# Altium PCB 555timer_blinker.PcbDoc
Units mm, origin at the board's own origin, x right, y up, seen from the top; angles counter-clockwise.
Board outline 31.37 x 56.64 mm, 2 copper layers (Top Layer, Bottom Layer); 12 components, 6 nets, 30 pads, 0 vias.
Unrouted connection lines stored in the file: 1.
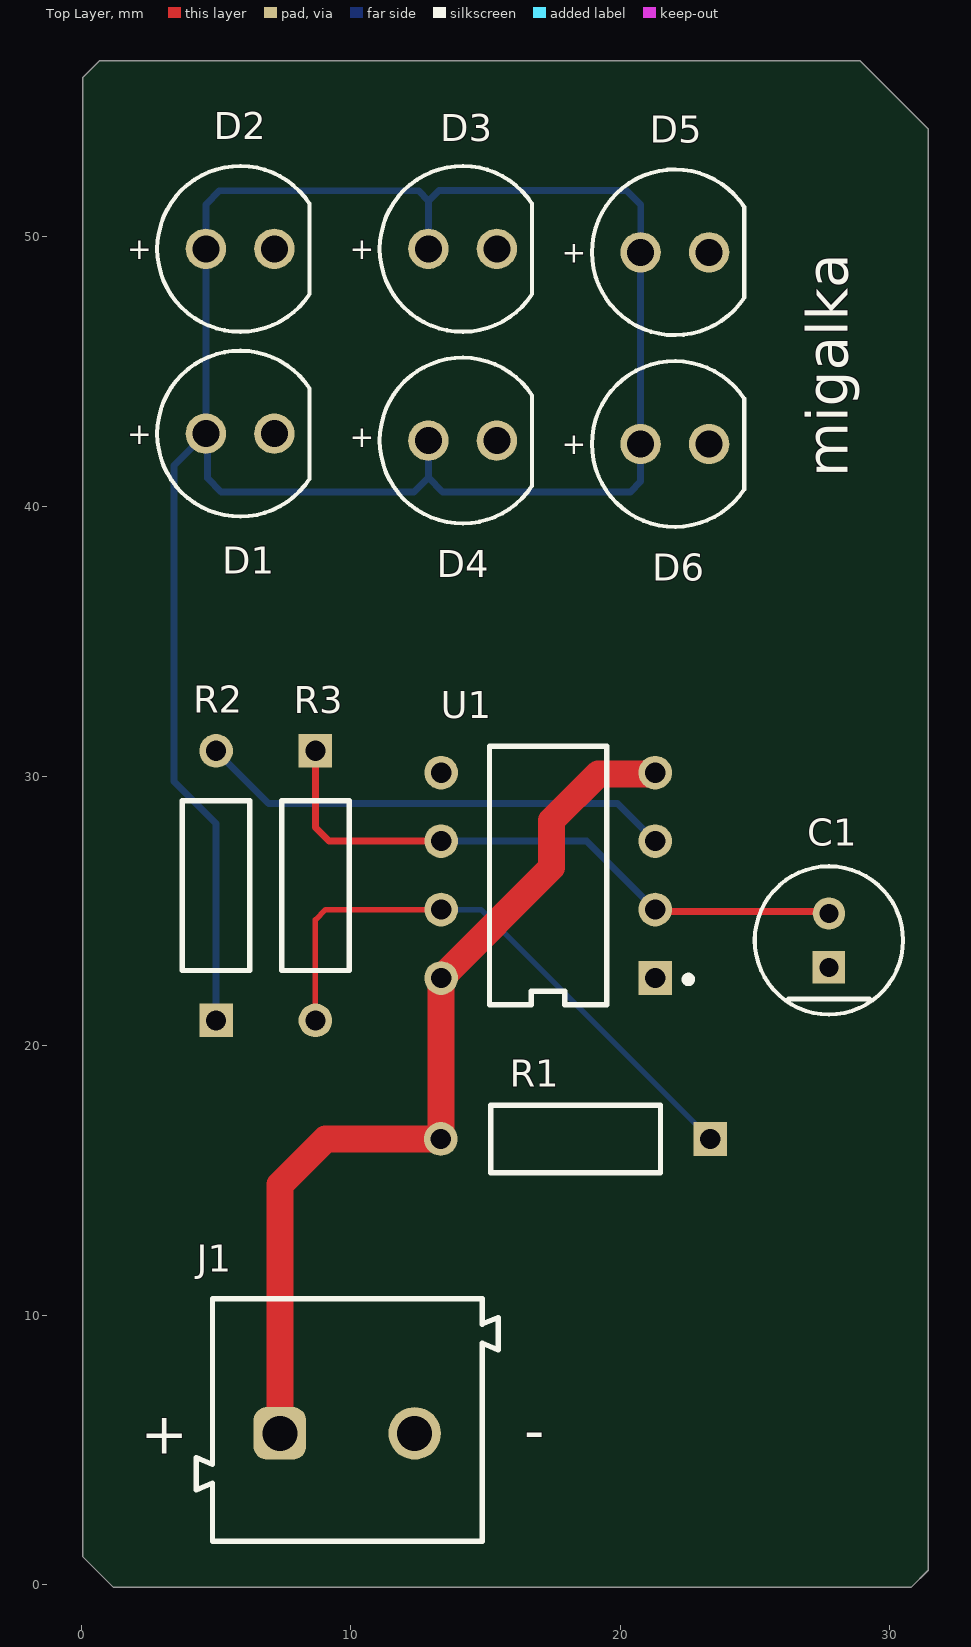
[diagram p0: Top Layer view]
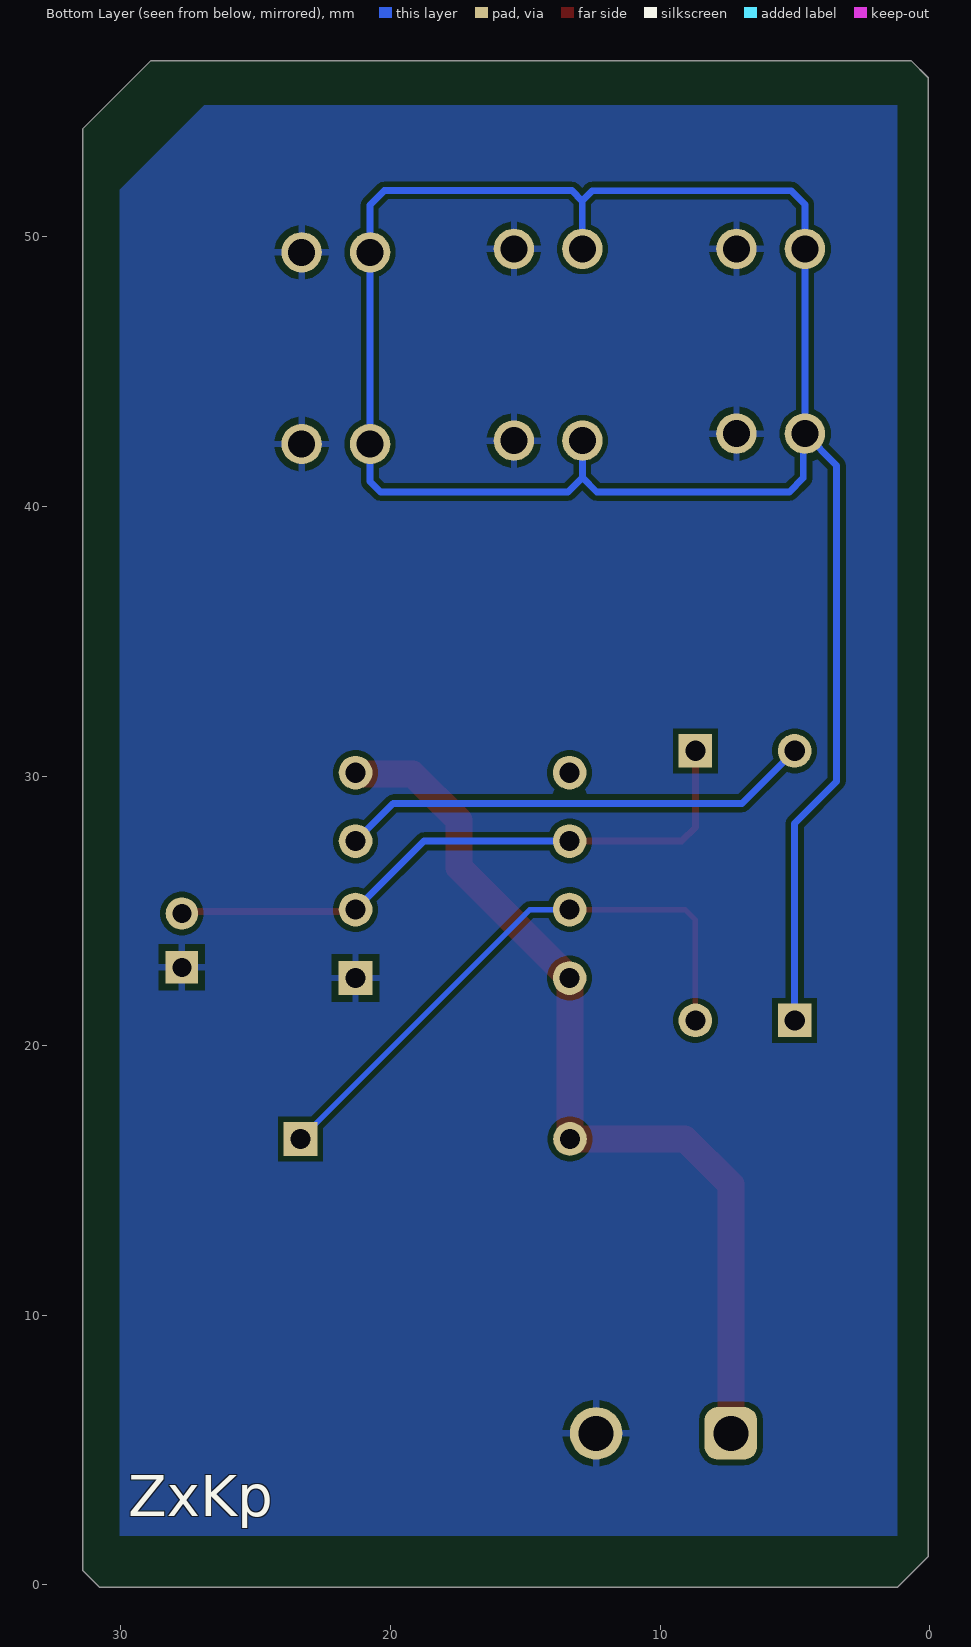
[diagram p1: Bottom Layer view, seen from below]
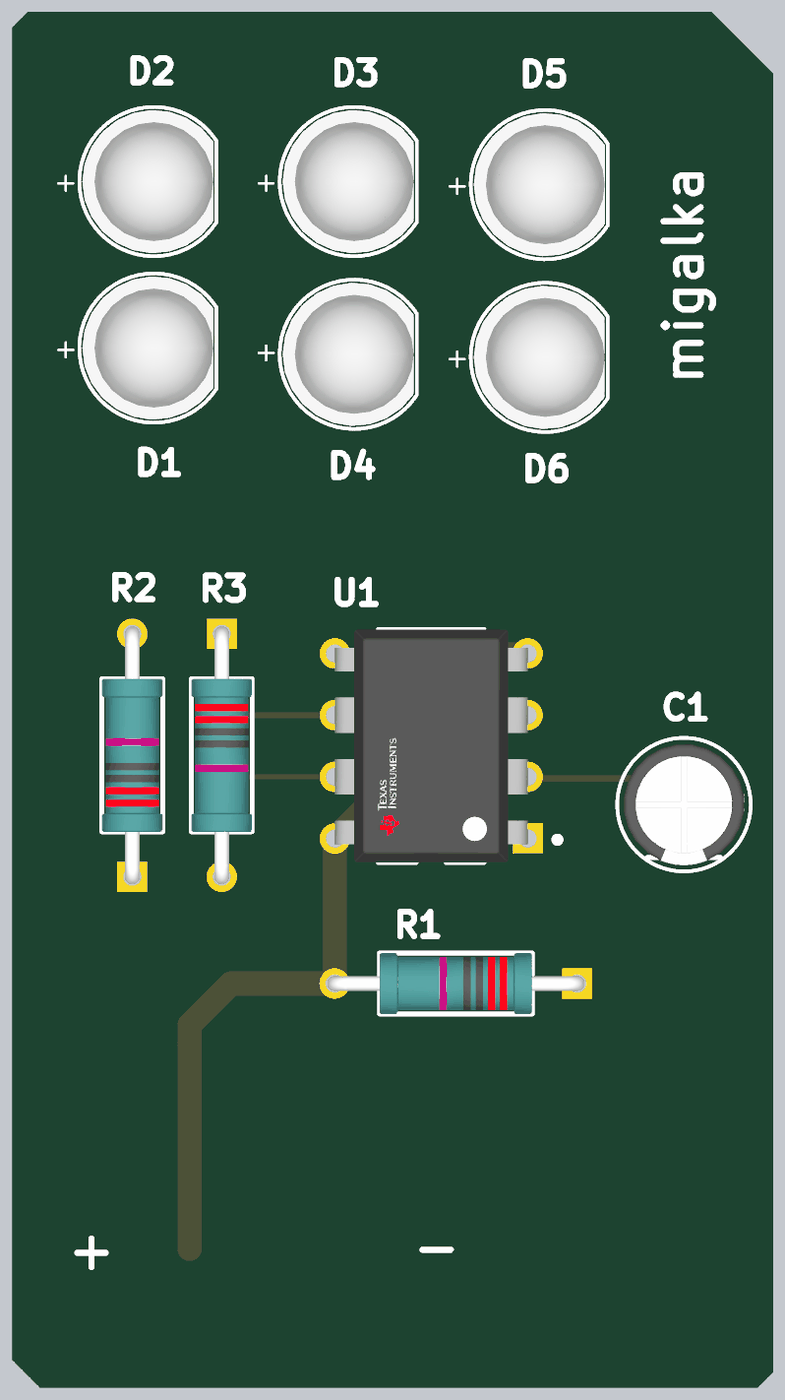
[diagram p2: 3D render of the assembled board from above, using the file's embedded part models]

## Layer stack, top to bottom
Top Solder: solder mask 0.0102, Solder Resist, Dk 3.5
Top Layer: signal copper 0.0356
Dielectric 1: dielectric 0.32, FR-4, Dk 4.8
Bottom Layer: signal copper 0.0356
Bottom Solder: solder mask 0.0102, Solder Resist, Dk 3.5

## Board outline
0.054,1.045 0.054,55.909 0.689,56.544 28.883,56.544 31.423,54.004 31.423,0.537 30.788,-0.098 1.197,-0.098

## Design rules (kind name [scope] priority, off if disabled: settings)
AssemblyTestPointUsage [All] p1: isadvanced=TRUE
AssemblyTestpoint [All] p1: isadvanced=TRUE testpointundercomponent=TRUE minsize=1.016 maxsize=2.54 preferedsize=1.524 minholesize=0 maxholesize=1.016 preferedholesize=0.813 testpointgrid=0.025 usegrid=TRUE gridtolerance=0 allowsidetop=TRUE allowsidebottom=TRUE
Clearance Clearance_1 [OnMid vs OnMid] p1: gap=0.2 ignorepadtopadclearanceinfootprint=FALSE sourcerule=37 cellrowname=All cellrowtype=0 cellcolname=All cellcoltype=0 innerlayers=TRUE
Clearance Clearance_2 [(ExistsOnLayer('Top Layer') Or ExistsOnLayer('Bottom Layer')) vs (ExistsOnLayer('Top Layer') Or ExistsOnLayer('Bottom Layer'))] p2: gap=0.2 ignorepadtopadclearanceinfootprint=FALSE sourcerule=37 cellrowname=All cellrowtype=0 cellcolname=All cellcoltype=0 outerlayers=TRUE
Clearance [All] p3: gap=0.254 ignorepadtopadclearanceinfootprint=FALSE ismatrix=TRUE
ComponentClearance [All] p1: isadvanced=TRUE gap=0.254 collisioncheckmode=3 verticalgap=0.254 showdistances=FALSE
FabricationTestPointUsage [All] p1: isadvanced=TRUE valid=0 allowmultiple=FALSE
FabricationTestpoint [All] p1: isadvanced=TRUE side=3 testpointundercomponent=TRUE minsize=1.016 maxsize=2.54 preferedsize=1.524 minholesize=0 maxholesize=1.016 preferedholesize=0.813 testpointgrid=0.025 allowsidetop=TRUE allowsidebottom=TRUE usegrid=TRUE gridtolerance=0
FanoutControl Fanout_BGA [IsBGA] p1: isadvanced=TRUE bgadir=Out bgaviamode=Centered fanoutstyle=Auto fanoutdirection=Alternating viagrid=0.025 // Fanout_BGA (Default Rule)
FanoutControl Fanout_LCC [IsLCC] p2: isadvanced=TRUE bgadir=Out bgaviamode=Centered fanoutstyle=Auto fanoutdirection=Alternating viagrid=0.025 // Fanout_LCC (Default Rule)
FanoutControl Fanout_SOIC [IsSOIC] p3: isadvanced=TRUE bgadir=Out bgaviamode=Centered fanoutstyle=Auto fanoutdirection=Alternating viagrid=0.025 // Fanout_SOIC (Default Rule)
FanoutControl Fanout_Small [(CompPinCount < 5)] p4: isadvanced=TRUE bgadir=Out bgaviamode=Centered fanoutstyle=Auto fanoutdirection=OutThenIn viagrid=0.025 // Fanout_Small (Default Rule)
FanoutControl Fanout_Default [All] p5: isadvanced=TRUE bgadir=Out bgaviamode=Centered fanoutstyle=Auto fanoutdirection=Alternating viagrid=0.025 // Fanout_Default (Default Rule)
Height [All] p1: isadvanced=TRUE minheight=0 maxheight=25.4 prefheight=12.7
HoleSize [All] p1: isadvanced=TRUE absolutevalues=TRUE maxlimit=2.54 minlimit=0.025 maxpercent=80.000 minpercent=20.000
HoleToHoleClearance [All] p1: isadvanced=TRUE gap=0.254 allowstackedmicrovias=TRUE
LayerPairs [All] p1: isadvanced=TRUE enforce=TRUE
MinimumSolderMaskSliver [All] p1: isadvanced=TRUE minsoldermaskwidth=0.254
NetAntennae [All] p1: isadvanced=TRUE netantennaetolerance=0
PasteMaskExpansion [All] p1: isadvanced=TRUE expansion=0
PlaneClearance [All] p1: isadvanced=TRUE clearance=0.508
PlaneConnect [All] p1: isadvanced=TRUE planeconnectstyle=Relief reliefexpansion=0.508 reliefentries=4 reliefconductorwidth=0.254 reliefairgap=0.254
PolygonConnect [All] p1: connectstyle=Relief reliefconductorwidth=0.254 reliefentries=4 polygonreliefangle="90 Angle" airgapwidth=0.254
RoutingCorners [All] p1: isadvanced=TRUE cornerstyle=45-Degree minsetback=2.54 maxsetback=2.54
RoutingPriority [All] p1: isadvanced=TRUE routingpriority=0
RoutingVias [All] p1: holewidth=0.711 width=1.27 viastyle="Through Hole" minholewidth=0.711 minwidth=1.27 maxholewidth=0.711 maxwidth=1.27
ShortCircuit [All] p1: isadvanced=TRUE allowed=FALSE
SilkToSilkClearance [All] p1: isadvanced=TRUE silktosilkclearance=0.254
SilkToSolderMaskClearance [IsPad] p1: isadvanced=TRUE minsilkscreentomaskgap=0.254 clearancetoexposedcopper=TRUE
SolderMaskExpansion [All] p1: isadvanced=TRUE expansion=0.102 istentingtop=FALSE
UnRoutedNet [All] p1: isadvanced=TRUE
UnpouredPolygon [All] p1: isadvanced=TRUE
Width MaxMinWidth_1 [All] p1: isadvanced=TRUE maxlimit=1 minlimit=0.2 preferedwidth=0.2 minimp=50.000000 maximp=50.000000 favimp=50.000000
Width [All] p2: maxlimit=0.254 minlimit=0.254 preferedwidth=0.254
4 further rules are at their usual default settings.

## Components (designator, comment, footprint, x,y, rotation, side; value= is the part's Value field where it differs from the comment)
C1 "4.7uF" FP-RAD-TH-D_5_0_5-L_11_1-MFG 27.74,23.905 r90 top
D1 "151051RS11000" WL-TMRC_D5.9H8.7 5.896,42.705 r0 top
D2 "151051RS11000" WL-TMRC_D5.9H8.7 5.896,49.559 r0 top
D3 "151051RS11000" WL-TMRC_D5.9H8.7 14.151,49.559 r0 top
D4 "151051RS11000" WL-TMRC_D5.9H8.7 14.151,42.447 r0 top
D5 "151051RS11000" WL-TMRC_D5.9H8.7 22.025,49.432 r0 top
D6 "151051RS11000" WL-TMRC_D5.9H8.7 22.025,42.32 r0 top
J1 "691101710002" 691101710002 1279.873,1276.117 r0 top
R1 "10k" FP-MBB0207-MFG 18.342,16.539 r180 top value=10kR
R2 "100" FP-MBB0207-MFG 5.007,25.937 r90 top value=100R
R3 "100k" FP-MBB0207-MFG 8.69,25.937 r270 top value=100kR
U1 "LM555CN/NOPB" FP-P0008A-MFG 17.326,26.318 r180 top

## Footprints (in the part's own frame and the unit in brackets; to place one, negate y for a bottom-side part, rotate by r counter-clockwise, add the part's x,y. Pads: shape width x height; smd on the part's side, far side on the other; paste and mask are expansions set on the pad)
691101710002 [mm] "5,00mm - modular - blue - Horizontal entry with pressure clamp - 12,6mm height - 02p"
  rrect50% 1.95x1.95 hole 1.3: 1(-1272.5,-1270.5)
  round 1.95 hole 1.3: 2(-1267.5,-1270.5)
  silkscreen extent -1275.6,-1274.5 -1264.4,-1265.5, body extent -1275.6,-1274.5 -1264.4,-1265.5, height 12.65
FP-MBB0207-MFG [mm]
  rect 1.25x1.25 hole 0.75 paste-2539.97 mask+0: 1(-5,0)
  round 1.25 hole 0.75 paste-2539.97 mask+0: 2(5,0)
  silkscreen extent -3.15,-1.25 3.15,1.25, body extent -5.72,-1.35 5.72,1.35, height 0.25
FP-P0008A-MFG [mm]
  rect 1.25x1.25 hole 0.75 paste-2539.97 mask+0: 1(-3.97,3.81)
  round 1.25 hole 0.75 paste-2539.97 mask+0: 2(-3.97,1.27) 3(-3.97,-1.27) 4(-3.97,-3.81) 5(3.97,-3.81) 6(3.97,-1.27) 7(3.97,1.27) 8(3.97,3.81)
  silkscreen extent -5.33,-4.79 2.17,4.79, body extent -4.69,-5.18 4.69,5.18, height 0.25
FP-RAD-TH-D_5_0_5-L_11_1-MFG [mm]
  rect 1.2x1.2 hole 0.7 paste-2539.97 mask+0: 1(-1,0)
  round 1.2 hole 0.7 paste-2539.97 mask+0: 2(1,0)
  silkscreen extent -2.75,-2.75 2.75,2.75, body extent -2.85,-2.85 2.85,2.85, height 0.25
WL-TMRC_D5.9H8.7 [mm] "THT Mono-color Round Color LED, 2-leads"
  round 1.5 hole 1: 1(-1.27,0) 2(1.27,0)
  silkscreen extent -3.07,-3.07 2.58,3.08, body extent -2.95,-2.95 2.45,2.95, height 9.2

## Part data
C1: library part CMP-05427-000256-1, "Aluminum Electrolytic Capacitors (Radial Lead Type) AEC-Q200 Qualified 4.7uF ±20% 50V", Case/Package=Radial, ESR (Equivalent Series Resistance)=1.3R, Max Operating Temperature=105°C, Min Operating Temperature=-55°C, Package Quantity=2000, Ratings=AEC-Q200, Ripple Current=95mA, Tolerance=20%, Voltage Rating=50V, Capacitance=4.7uF, Contact Plating=Tin, Diameter=5mm, Features="General Purpose", Height=11mm, Height - Seated (Max)=0.472inch, Impedance=1.3R, Lead Diameter=0.5mm, Lead Pitch=2.5mm, Length=11mm, Life (Hours)=1000Hour, Mount="Through Hole", Packaging="Ammo Pack", Polarity=Polar, Radiation Hardening=No, RoHS Compliant=Yes, Series=FC, Termination=Radial, Voltage Rating (DC)=50V
D1 D2 D3 D4 D5 D6: library part CMP-1488-00008-2, Case/Package=Radial, Color=Red, Forward Current=100mA, Forward Voltage=2.1V, Max Operating Temperature=85°C, Max Reverse Voltage (DC)=5V, Min Operating Temperature=-40°C, Test Current=20mA, Dominant Wavelength=645nm, Height=8.6mm, Length=5mm, Lens Size=5mm, Lens Style="Circular, Diffused, Round", Luminous Intensity=30mcd, Mount="Through Hole", NexarPartId=29717813, Packaging=Bulk, Peak Wavelength=650nm, REACH SVHC=Unknown, RoHS=Compliant, Viewing Angle=60°, Wavelength=630nm, Width=5mm
J1: library part CMP-1502-03256-2, Color=Blue, Current=16A, Max Operating Temperature=105°C, Min Operating Temperature=-40°C, Voltage=250V, Contact Material=Brass, Contact Plating=Tin, Current Rating=16A, Height=16.4mm, Housing Material=Nylon, Lead Pitch=5mm, Length=9mm, Mount="Through Hole", NexarPartId=8917704, Number of Contacts=2, Number of Levels=1, Number of Pins=2, Number of Positions Per Level=2, Packaging=Box, Pitch=5.0038mm, Plating=Steel, REACH SVHC=Unknown, RoHS=Compliant, Stripping Length=-7mm, Termination=Screw, Voltage Rating=250V, Width=11.2mm, Wire Gauge (Max)=26AWG, Wire Gauge (Min)=14AWG, Wire/Cable Gauge=26AWG
R1: library part CMP-02408-000035-1, "RES 10K OHM 0.6W 1% AXIAL", Case/Package=Conformal, Max Operating Temperature=155°C, Max Power Dissipation=600mW, Min Operating Temperature=-55°C, Resistance=10kR, Resistance Tolerance=1%, Resistor Type="Metal Film", Temperature Coefficient=50ppm/°C, Voltage Rating=300V, Construction=Cylindrical, Contact Plating=Tin, Diameter=2.5mm, Features="Automotive AEC-Q200", Lead Free="Lead Free", Length=6.5mm, Military Standard=Not, Number of Terminations=2, Packaging="Tape and Reel", Power Rating=600mW, Radiation Hardening=No, RoHS Compliant=Yes, Series="MBB 0207 - Professional", Technology="THIN FILM", Termination=Axial, Tolerance=1%, Voltage Rating (DC)=300V
R2: library part CMP-02408-000035-1, "RES 10K OHM 0.6W 1% AXIAL", Case/Package=Conformal, Max Operating Temperature=155°C, Max Power Dissipation=600mW, Min Operating Temperature=-55°C, Resistance=100R, Resistance Tolerance=1%, Resistor Type="Metal Film", Temperature Coefficient=50ppm/°C, Voltage Rating=300V, Construction=Cylindrical, Contact Plating=Tin, Diameter=2.5mm, Features="Automotive AEC-Q200", Lead Free="Lead Free", Length=6.5mm, Military Standard=Not, Number of Terminations=2, Packaging="Tape and Reel", Power Rating=600mW, Radiation Hardening=No, RoHS Compliant=Yes, Series="MBB 0207 - Professional", Technology="THIN FILM", Termination=Axial, Tolerance=1%, Voltage Rating (DC)=300V
R3: library part CMP-02408-000035-1, "RES 10K OHM 0.6W 1% AXIAL", Case/Package=Conformal, Max Operating Temperature=155°C, Max Power Dissipation=600mW, Min Operating Temperature=-55°C, Resistance=100kR, Resistance Tolerance=1%, Resistor Type="Metal Film", Temperature Coefficient=50ppm/°C, Voltage Rating=300V, Construction=Cylindrical, Contact Plating=Tin, Diameter=2.5mm, Features="Automotive AEC-Q200", Lead Free="Lead Free", Length=6.5mm, Military Standard=Not, Number of Terminations=2, Packaging="Tape and Reel", Power Rating=600mW, Radiation Hardening=No, RoHS Compliant=Yes, Series="MBB 0207 - Professional", Technology="THIN FILM", Termination=Axial, Tolerance=1%, Voltage Rating (DC)=300V
U1: library part CMP-0056-00016-4, "IC OSC SINGLE TIMER 100KHZ 8-DIP", Ambient Temperature Range High=+70°C, Ambient Temperature Range Low=0°C, Manufacturer="Texas Instruments", Max Supply Voltage=16V, Min Supply Voltage=4.5V, Nominal Supply Current=3mA, Package=P0008A, Temperature="0°C to +70°C", Automotive=No, Category=IC, ComponentLink2Description=Datasheet, ComponentLink2URL=http://www.ti.com/lit/ds/symlink/lm555.pdf, Device Class L1="Integrated Circuits (ICs)", Device Class L2="Clock and Timing", Device Class L3="Timers and Oscillators", Digikey Description="IC OSC SINGLE TIMER 100KHZ 8-DIP", Height=5.08mm, Lead Free=Yes, Manufacturer Part Number=LM555CN/NOPB, Max Junction Temp=+70°C, Number Of Timers/Counters=1, Octopart=https://octopart.com/lm555cn%2Fnopb-texas+instruments-24814897, RoHS=TRUE, Standoff Height=0.51mm, Temperature Range High=+70°C, Temperature Range Low=0°C

## Nets (pads, with @x,y where several pads share a name; then routed paths per layer and width w, separated by ;. In a path a pad name is that pad's centre, name@x,y a point inside that pad or via, vN(x,y) a via of type N, cw(c..) or ccw(c..) an arc to the next point about the centre after c; other vN are vias at no path point)
+9V: J1.1 R1.2 U1.4 U1.8 | length 33.8
  Top Layer w1: J1.1 7.373,14.841 9.071,16.539 R1.2 U1.8@13.342,22.299 ; U1.8 17.453,26.605 17.453,28.35 19.183,30.08 21.248,30.08 U1.4
GND: C1.1 D1.2 D2.2 D3.2 D4.2 D5.2 D6.2 J1.2 U1.1
NetC1_2: C1.2 R3.1 U1.2 U1.6 | length 23.2
  Top Layer w0.254: R3.1 8.69,28.096 9.198,27.588 U1.6 ; U1.2 21.367,24.977 27.668,24.977 C1.2
  Bottom Layer w0.254: U1.6 18.756,27.588 U1.2
NetD1_1: D1.1 D2.1 D3.1 D4.1 D5.1 D6.1 R2.1 | length 79.9
  Bottom Layer w0.254: D1.1@4.689,42.701 4.689,41.05 5.198,40.542 12.349,40.542 12.881,41.074 ; R2.1 5.007,28.243 3.45,29.8 3.45,41.529 D1.1 D2.1 4.626,51.21 5.134,51.718 12.515,51.718 12.889,51.344 ; D4.1 12.881,41.074 ; D3.1 D3.1@12.881,49.947 ; D3.1@12.889,49.947 12.889,51.344 ; D5.1 D6.1 20.755,40.923 20.374,40.542 13.414,40.542 12.881,41.074 ; D5.1@20.763,49.82 20.763,51.193 20.23,51.725 13.27,51.725 12.889,51.344
NetR1_1: R1.1 R3.2 U1.7 | length 22.1
  Top Layer w0.2: R3.2 8.69,24.667 9.071,25.048 U1.7
  Bottom Layer w0.2: U1.7 14.833,25.048 R1.1
NetR2_2: R2.2 U1.3 | length 17.7
  Bottom Layer w0.254: R2.2 6.959,28.985 19.899,28.985 U1.3
pads on no net: U1.5

## Polygon pours and split planes (outlines as drawn)
GND on Bottom Layer "GND_L02_P000" (solid, pour order 0): 1.197,1.822 30.05,1.822 30.05,51.75 26.911,54.889 1.197,54.889

## Silkscreen, mask and mechanical layers (free items; w line width, h text height)
Top Overlay:
  text "migalka" at 28.438,41.079 h1.52 r90
  text "-" at 16.437,4.982 h1.52
  text "+" at 2.213,4.855 h1.52
Bottom Overlay:
  text "ZxKp" at 29.721,2.537 h1.52
Mechanical 1:
  lines w0.5: 0.054,1.045 1.197,-0.098 4.372,-0.098 30.788,-0.098 31.423,0.537 31.423,54.004 28.883,56.544 0.689,56.544 0.054,55.909 0.054,1.045

## Text inside footprints (layer, text, board x,y; h text height)
D1: Top Overlay "+" at 1.705,42.32 h0.8
D2: Top Overlay "+" at 1.705,49.178 h0.8
D3: Top Overlay "+" at 9.96,49.178 h0.8
D4: Top Overlay "+" at 9.96,42.193 h0.8
D5: Top Overlay "+" at 17.834,49.051 h0.8
D6: Top Overlay "+" at 17.834,41.939 h0.8